# Altium PCB Shot_bot_PCB_V1.PcbDoc
Units mil, origin at the board's own origin, x right, y up, seen from the top; angles counter-clockwise.
Board outline 2615 x 2520 mil, 2 copper layers (Top Layer, Bottom Layer); 6 components, 18 nets, 70 pads, 5 vias.
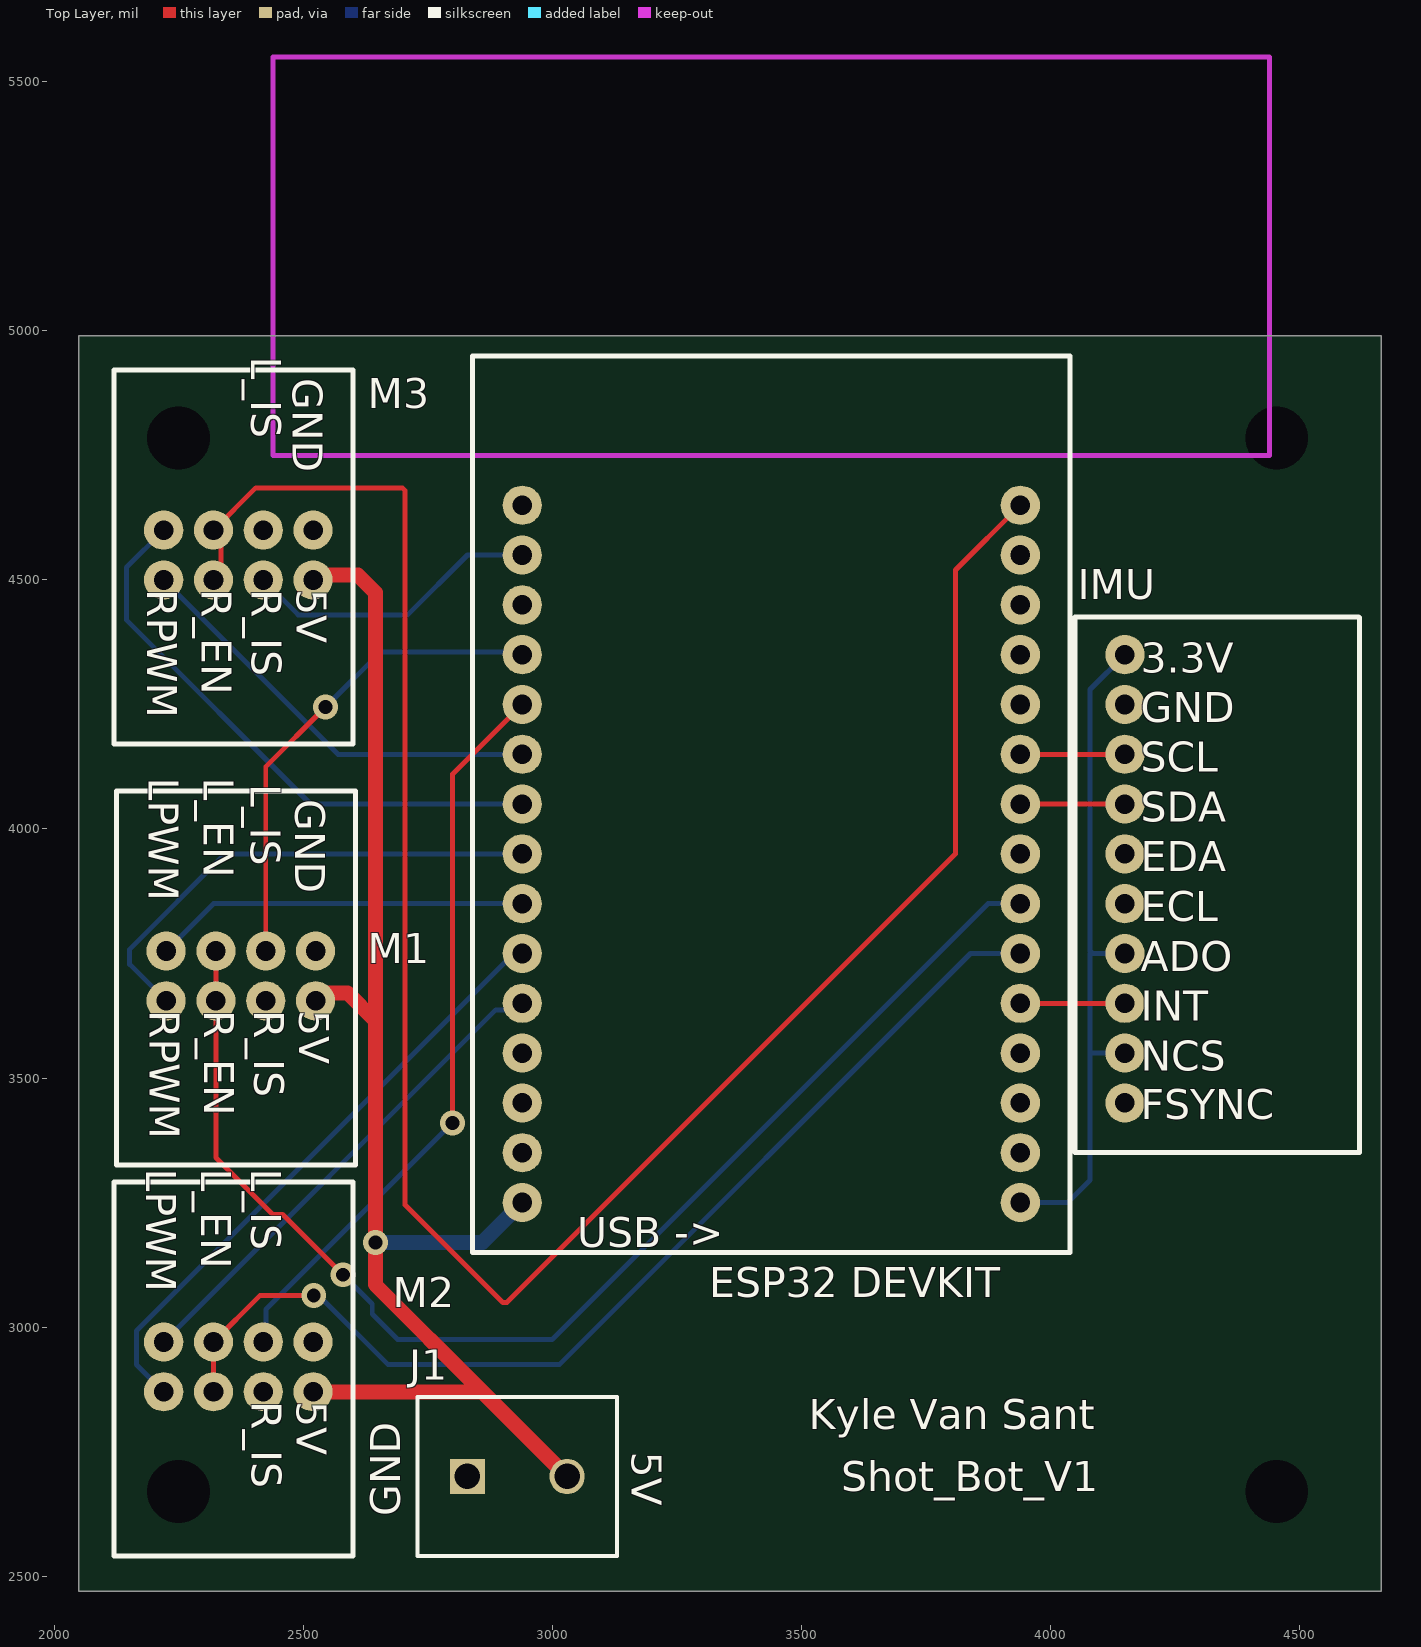
[diagram p0: Top Layer view]
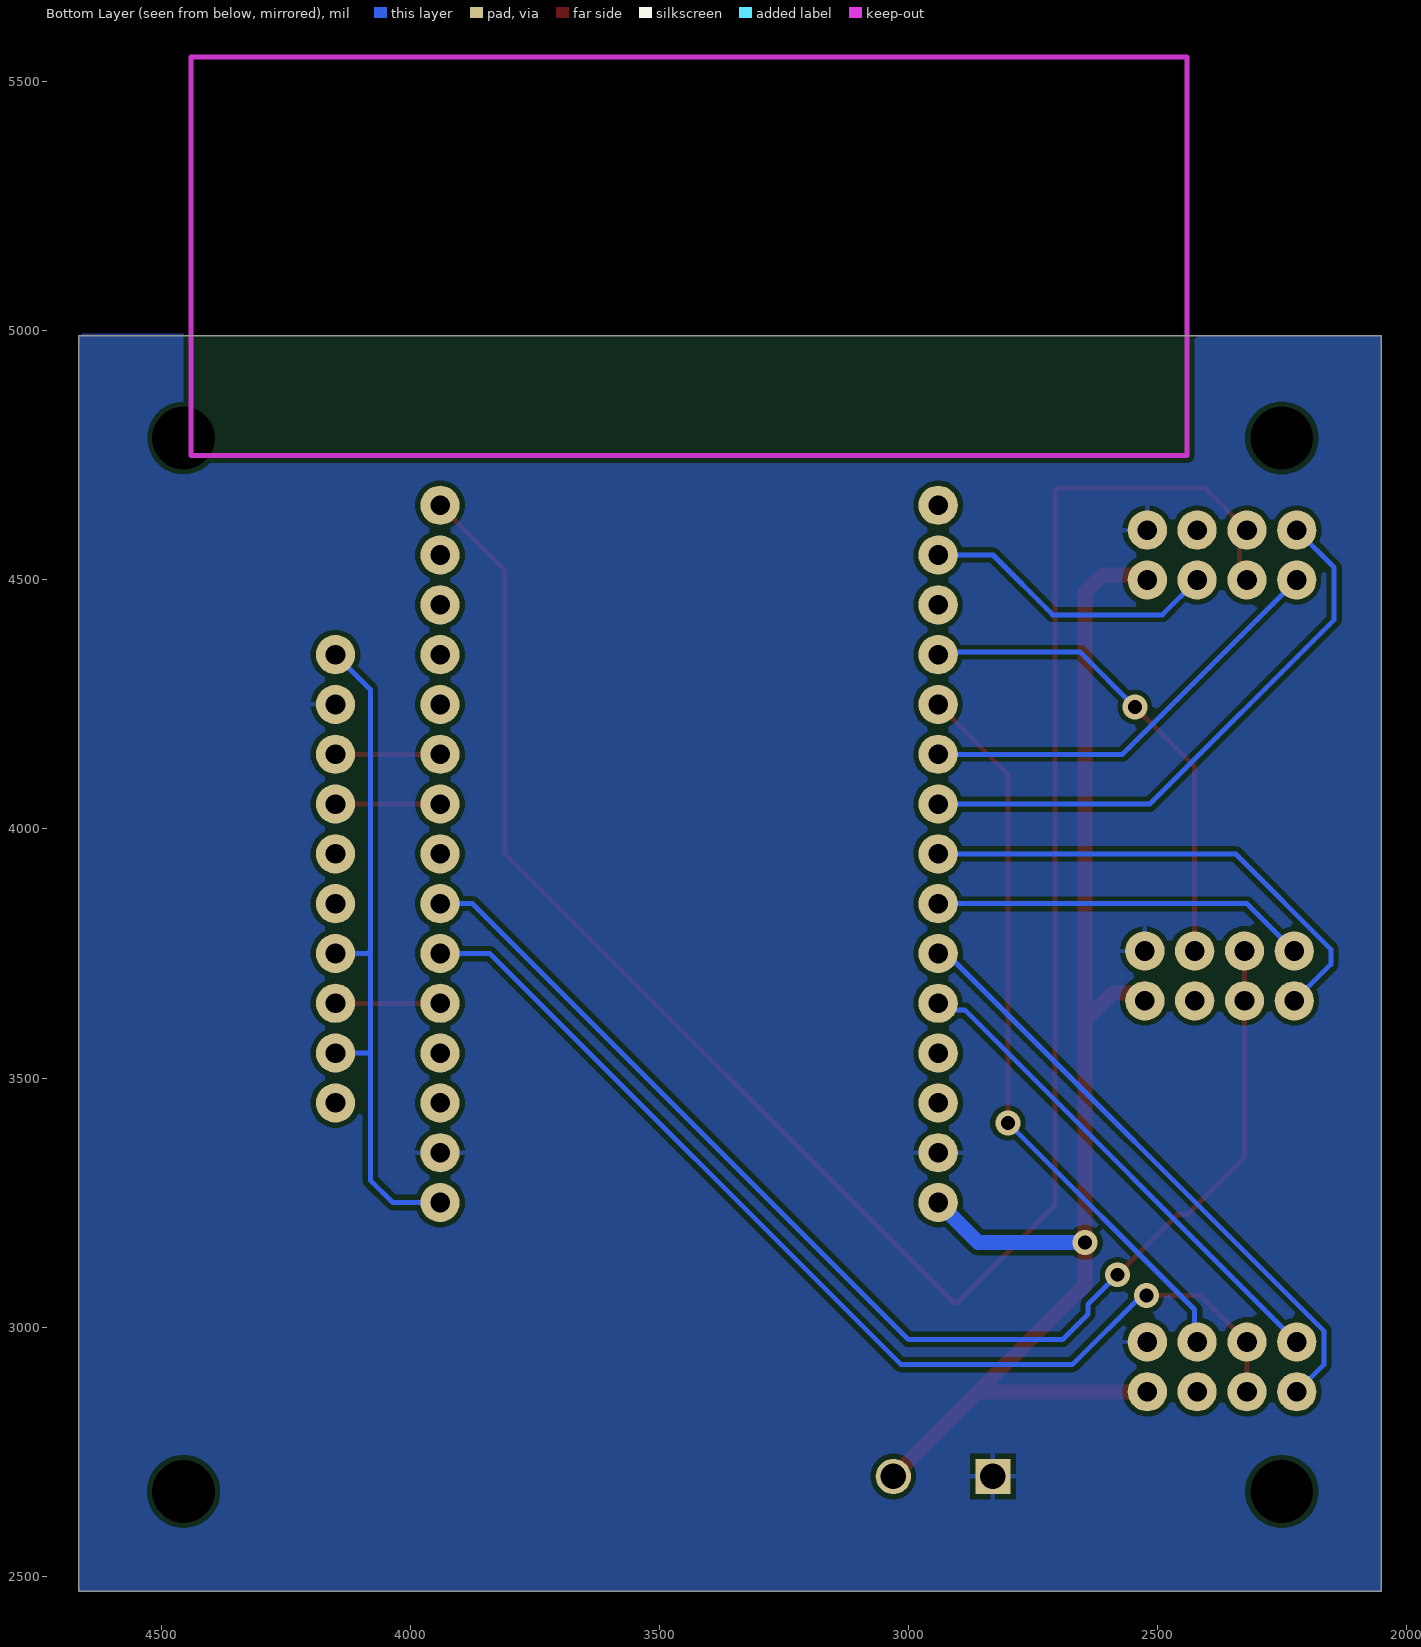
[diagram p1: Bottom Layer view, seen from below]

## Layer stack, top to bottom
Top Solder: solder mask 0.4, Solder Resist, Dk 3.5
Top Layer: signal copper 1.4
Dielectric 1: dielectric 12.6, FR-4, Dk 4.8
Bottom Layer: signal copper 1.4
Bottom Solder: solder mask 0.4, Solder Resist, Dk 3.5

## Board outline
2050,2470 4665,2470 4665,4990 2050,4990

## Design rules (kind name [scope] priority, off if disabled: settings)
Clearance [All] p1: gap=10 ignorepadtopadclearanceinfootprint=FALSE
PolygonConnect [All] p1: connectstyle=Relief reliefconductorwidth=10 reliefentries=4 polygonreliefangle="90 Angle" airgapwidth=10
RoutingVias [All] p1: holewidth=28 width=50 viastyle="Through Hole" minholewidth=28 minwidth=50 maxholewidth=28 maxwidth=50
SolderMaskExpansion [All] p1: expansion=4 istentingtop=FALSE
SupplyNets "Schematic Supply Nets" [InNet('GND')] p1: voltage=0.000
Width [All] p1: maxlimit=10 minlimit=10 preferedwidth=10
30 further rules are at their usual default settings.

## Components (designator, comment, footprint, x,y, rotation, side; value= is the part's Value field where it differs from the comment)
"ESP32 DEVKIT" "ESP32-DEVKIT_CARRIER" ESP32_DEVKIT_CARRIER 2940,4650 r0 top
IMU "IMU_header" PCBComponent_1#1 4150,4350 r0 top (schematic designator U5)
J1 "1729128" PHOE-1729128-2_V 2930,2700 r0 top
M1 "BTS7960_Header_1x8" PCBComponent_1#2 2525,3755 r270 top
M2 "BTS7960_Header_1x8" PCBComponent_1#2 2520,2970 r270 top
M3 "BTS7960_Header_1x8" PCBComponent_1#2 2520,4600 r270 top

## Footprints (in the part's own frame and the unit in brackets; to place one, negate y for a bottom-side part, rotate by r counter-clockwise, add the part's x,y. Pads: shape width x height; smd on the part's side, far side on the other; paste and mask are expansions set on the pad)
ESP32_DEVKIT_CARRIER [mm]
  round 2 hole 1: 1(0,0) 2(0,-2.54) 3(0,-5.08) 4(0,-7.62) 5(0,-10.16) 6(0,-12.7) 7(0,-15.24) 8(0,-17.78) 9(0,-20.32) 10(0,-22.86) 11(0,-25.4) 12(0,-27.94) 13(0,-30.48) 14(0,-33.02) 15(0,-35.56) 16(25.4,0) 17(25.4,-2.54) 18(25.4,-5.08) 19(25.4,-7.62) 20(25.4,-10.16) 21(25.4,-12.7) 22(25.4,-15.24) 23(25.4,-17.78) 24(25.4,-20.32) 25(25.4,-22.86) 26(25.4,-25.4) 27(25.4,-27.94) 28(25.4,-30.48) 29(25.4,-33.02) 30(25.4,-35.56)
  Keep-Out Layer region: -12.7,22.86 -12.7,2.54 38.1,2.54 38.1,22.86
  Keep-Out Layer lines w0.254: -12.7,2.54 -2.54,2.54 38.1,2.54 38.1,22.86 -12.7,22.86 -12.7,2.54
  silkscreen extent -2.54,-38.1 27.94,7.62
PCBComponent_1#1 [mm]
  round 2 hole 1: 1(0,0) 2(0,-2.54) 3(0,-5.08) 4(0,-7.62) 5(0,-10.16) 6(0,-12.7) 7(0,-15.24) 8(0,-17.78) 9(0,-20.32) 10(0,-22.86)
  silkscreen extent -2.54,-25.4 11.96,1.93
PCBComponent_1#2 [mm]
  round 2 hole 1: 1(0,0) 2(2.54,0) 3(2.54,-2.54) 4(0,-2.54) 5(2.54,-5.08) 6(0,-5.08) 7(2.54,-7.62) 8(0,-7.62)
  silkscreen extent -8.17,-10.16 10.91,2.03
PHOE-1729128-2_V [mm] "Receptacle, 2-Leads, Body 8.1x10.16mm, Pitch 5.08mm"
  rect 1.8x1.8 hole 1.3: 1(-2.54,0)
  round 1.8 hole 1.3: 2(2.54,0)
  silkscreen extent -5.08,-4.05 5.08,4.05, body extent -5.65,-4.05 5.08,4.05, height 10.01

## Part data
J1: library part CMP-2000-05815-1, "PCB Terminal Block, 13.5 A, 400 V, 2-Pin THD, RoHS, Bulk", Current Rating=13500mA, Manufacturer="Phoenix Contact", Package Description="2-Pin Through Hole Device, Body 8.1 x 10.16 mm, Pitch 5.08 mm", Package Reference=1729128-2, Package Version=03/2015, Voltage Rating=400V, Datasheet URL=https://datasheet.ciiva.com/16046/1729128-16046181.pdf, Datasheet Version=12/2013, Manufacturer URL=http://www.phoenixcontact.com/, Mounting Technology=ThroughHole, No. of Positions=2, No. of Rows=1, Orientation=Horizontal, Package URL=https://www.phoenixcontact.com/online/portal/pi/pxc/product_detail_page/!ut/p/b1/3VdJjqNKFDxLH8AFycySyWY2ozFsEPOMMQaDOX1XedGL_1Vdm5YXJleknhSKeBkvI6EA8ncAo3AYoDhBQGco6KN7VURTdemj9us_IEKEZo_YHiPAEWEFmDGOHMORkqKYCORBZxgL7ZoaZYcbFFUZ3fqxSY6GOuxydWUuHqz1ynmMFygu583Bob0Ewr6Sd_l-5m-kAueHiB0jpRwZwe58wwtkpxtMYd_LmGcDRU02dRNEyWt6Y2ti5pSyJ_reIkzIulrqApdnbT11V5jnCKbYNCvhEM1MCpPByat_X379-iThf08CI5GfOPqfBeS3BRoBOdD55AKVv0iLwCMq-2BrzXWSGRH7pUGD9uwXQjiph3xL0DKQwdGa0JImiIOmBNOestqgwTHSSs2oOep-78apyXQBvNi8ZLaFjvjWvcaUEBu0MC6Wbe-d6mB0FAebo2lUWinqYaZs5DAYzV0RP9yitUjnGJ0iI9xhZkT42OCQNUJJhkgWINNQLP2JFP6OpMg3JCVg70jqHT0lvKOnhHf0lPuOnnLf0VPuWx6_dxwUIvwk5WMkT0kLL1mh61l2yZVSzG3pYV_bqo-mj6uMKwKwdnnW8Jh5RTOJzMOA5c-eJDaZQw4mTMPH02PvS_ZAqNVjVTo2WyYLkwH_KU1mmmG5kjRhDqPXLwwVHvVOjCM60-fpXvTDfMGW1PVFVS1r4e4yVDk4ZdNbkUHvqPqQSeian4UD39fNKmachqdJ1NJbyk8rXT9mXTvPk3oE5meulKGgiruPJek-4I9hTT6G8ZLOyRSm2RRVbThERQad5OS28hdt4YW4vG0stgYYzsWsK4_7y6DZMjJSCqri1kyiZR5vD7pwIrNR7QwPHTcLTI5qT7eRlpHrdGiupYlqQDJ7zy_CND8fWWBoLRXxk1RVcXiBQwbTD4Xi7KL-FuO94t9xaqweXzH, Packing=Bulk, PartNumber=1729128, Pitch=5.08mm, RoHS=TRUE

## Free pads (board coordinates)
  round 0 hole 125.98: 6(2250,2670) 7(4455,2670) 8(4455,4785) 9(2250,4785)

## Via types
v1: diameter 50, hole 28, Top Layer to Bottom Layer, 5 vias

## Nets (pads, with @x,y where several pads share a name; then routed paths per layer and width w, separated by ;. In a path a pad name is that pad's centre, name@x,y a point inside that pad or via, vN(x,y) a via of type N, cw(c..) or ccw(c..) an arc to the next point about the centre after c; other vN are vias at no path point)
GND: "ESP32 DEVKIT.14" "ESP32 DEVKIT.29" IMU.2 J1.1 M1.1 M2.1 M3.1
"NetESP32 DEVKIT_2": "ESP32 DEVKIT.2" M3.3 | length 598.7
  Bottom Layer w10: M3.3 2490,4430 2710,4430 2830,4550 2940,4550
"NetESP32 DEVKIT_4": "ESP32 DEVKIT.4" M1.4 | length 982.3
  Top Layer w10: M1.4 2425,4125 v1(2545,4245)
  Bottom Layer w10: v1(2545,4245) 2655,4355 2935,4355 2940,4350
"NetESP32 DEVKIT_5": "ESP32 DEVKIT.5" M2.4 | length 1495.4
  Top Layer w10: v1(2800,3410) 2800,4110 2940,4250
  Bottom Layer w10: M2.4 2425.19,2975.19 2425.19,3035.19 v1(2800,3410)
"NetESP32 DEVKIT_6": "ESP32 DEVKIT.6" M3.7 | length 865
  Bottom Layer w10: M3.7 2570,4150 2940,4150
"NetESP32 DEVKIT_7": "ESP32 DEVKIT.7" M3.8 | length 1159.3
  Bottom Layer w10: M3.8 2145,4525 2145,4420 2515,4050 2940,4050
"NetESP32 DEVKIT_8": "ESP32 DEVKIT.8" M1.7 | length 1001.6
  Bottom Layer w10: M1.7 2151.64,3728.36 2151.64,3758.53 2343.11,3950 2940,3950
"NetESP32 DEVKIT_9": "ESP32 DEVKIT.9" M1.8 | length 754.4
  Bottom Layer w10: M1.8 2320,3850 2940,3850
"NetESP32 DEVKIT_10": "ESP32 DEVKIT.10" M2.7 | length 1233.2
  Bottom Layer w10: M2.7 2165.63,2924.37 2165.63,2992.52 2923.11,3750 2940,3750
"NetESP32 DEVKIT_11": "ESP32 DEVKIT.11" M2.8 | length 1001.7
  Bottom Layer w10: M2.8 2886.85,3636.85 2926.85,3636.85 2940,3650
"NetESP32 DEVKIT_15": "ESP32 DEVKIT.15" J1.2 M1.2 M2.2 M3.2 | length 2864
  Top Layer w10: M1.2@2535,3680 M1.2@2544.37,3670.63
  Top Layer w30: M2.2@2520.33,2869.67 2860.33,2869.67 ; M3.2@2535,4510 2610,4510 2645,4475 2645,3615 ; M1.2@2544.37,3670.63 2589.37,3670.63 2645,3615 ; J1.2 2860.33,2869.67 ; 2645,3615 v1(2645,3170) 2645,3085 2860.33,2869.67
  Bottom Layer w30: v1(2645,3170) 2860,3170 2940,3250
"NetESP32 DEVKIT_16": "ESP32 DEVKIT.16" M3.5 M3.6 | length 4269.9
  Top Layer w10: M3.6 2405,4685 2699.14,4685 2705,4679.14 2705,3245 2900.86,3049.14 2909.14,3049.14 3810,3950 3810,4520 3940,4650 ; M3.5@2335,4510 M3.6@2335,4610
"NetESP32 DEVKIT_21": "ESP32 DEVKIT.21" IMU.3 | length 210
  Top Layer w10: 3940,4150 IMU.3
"NetESP32 DEVKIT_22": "ESP32 DEVKIT.22" IMU.4 | length 210
  Top Layer w10: 3940,4050 IMU.4
"NetESP32 DEVKIT_24": "ESP32 DEVKIT.24" M1.5 M1.6 | length 2555.3
  Top Layer w10: M1.6 M1.5 2325,3340 2438.67,3226.33 2458.67,3226.33 v1(2580,3105)
  Bottom Layer w10: v1(2580,3105) 2638.83,3046.17 2638.83,3026.17 2690,2975 3000,2975 3875,3850 3940,3850
"NetESP32 DEVKIT_25": "ESP32 DEVKIT.25" M2.5 M2.6 | length 2157.5
  Top Layer w10: M2.5 M2.6 2413.17,3063.17 v1(2521.33,3063.17)
  Bottom Layer w10: v1(2521.33,3063.17) 2531.83,3063.17 2670,2925 3015,2925 3840,3750 3940,3750
"NetESP32 DEVKIT_26": "ESP32 DEVKIT.26" IMU.8 | length 210
  Top Layer w10: 3940,3650 IMU.8
"NetESP32 DEVKIT_30": "ESP32 DEVKIT.30" IMU.1 IMU.7 IMU.9 | length 1379.7
  Bottom Layer w10: 3940,3250 4035,3250 4080,3295 4080,3550 ; 4080,3750 4080,3550 ; IMU.9 4080,3550 ; IMU.7 4085,3750 4080,3755 4080,4280 IMU.1
pads on no net: "ESP32 DEVKIT.1" "ESP32 DEVKIT.3" "ESP32 DEVKIT.12" "ESP32 DEVKIT.13" "ESP32 DEVKIT.17" "ESP32 DEVKIT.18" "ESP32 DEVKIT.19" "ESP32 DEVKIT.20" "ESP32 DEVKIT.23" "ESP32 DEVKIT.27" "ESP32 DEVKIT.28" IMU.5 IMU.6 IMU.10 M1.3 M2.3 M3.4

## Polygon pours and split planes (outlines as drawn)
GND on Bottom Layer "GND_L02_P000" (solid, pour order 0): 2050,4990 2050,2470 4665,2470 4665,4994.52

## Silkscreen, mask and mechanical layers (free items; w line width, h text height)
Top Overlay:
  text "Kyle Van Sant" at 3515,2794.99 h60
  text "5V" at 3160,2750 h60 r270
  text "Shot_Bot_V1" at 3580,2670 h60
  text "GND" at 2695,2620 h60 r90
Mechanical 1:
  lines w10: 2050,2470 2050,4990 4665,4990 4665,3185 4665,2967.5 4665,2470 2050,2470

## Text inside footprints (layer, text, board x,y; h text height)
"ESP32 DEVKIT": Top Overlay "USB ->" at 3050,3160 h60
IMU: Top Overlay "FSYNC" at 4181.99,3416.92 h60; Top Overlay "3.3V" at 4181.99,4313.65 h60; Top Overlay "GND" at 4181.99,4214.68 h60; Top Overlay "SCL" at 4181.99,4114.68 h60; Top Overlay "SDA" at 4181.99,4014.68 h60; Top Overlay "EDA" at 4181.99,3914.68 h60; Top Overlay "ECL" at 4181.99,3814.68 h60; Top Overlay "ADO" at 4181.99,3714.68 h60; Top Overlay "INT" at 4181.99,3614.68 h60; Top Overlay "NCS" at 4181.99,3514.68 h60
M1: Top Overlay "GND" at 2484.51,4060.14 h60 r270; Top Overlay "L_IS" at 2395,4090 h60 r270; Top Overlay "L_EN" at 2300.39,4102.98 h60 r270; Top Overlay "LPWM" at 2190.4,4102.98 h60 r270; Top Overlay "RPWM" at 2191.95,3636.03 h60 r270; Top Overlay "R_EN" at 2301.95,3636.03 h60 r270; Top Overlay "R_IS" at 2401.95,3636.03 h60 r270; Top Overlay "5V" at 2491.95,3636.03 h60 r270
M2: Top Overlay "L_IS" at 2395.39,3317.98 h60 r270; Top Overlay "L_EN" at 2295.39,3317.98 h60 r270; Top Overlay "LPWM" at 2185.4,3317.98 h60 r270; Top Overlay "R_IS" at 2396.95,2851.03 h60 r270; Top Overlay "5V" at 2486.95,2851.03 h60 r270
M3: Top Overlay "GND" at 2479.51,4905.14 h60 r270; Top Overlay "L_IS" at 2395.39,4947.98 h60 r270; Top Overlay "RPWM" at 2186.95,4481.03 h60 r270; Top Overlay "R_EN" at 2296.95,4481.03 h60 r270; Top Overlay "R_IS" at 2396.95,4481.03 h60 r270; Top Overlay "5V" at 2486.95,4481.03 h60 r270